# EAGLE board stm32-stamp (EAGLE 5.11)

Size 60.96 x 30.48 mm. Coordinates in mm from the lower left corner, seen from the top.
Outline: 0,0 60.96,0 60.96,30.48 0,30.48 0,0
Copper layers (1*16): Top 0.035mm / dielectric 1.5mm / Bottom 0.035mm
Design rules "default *": minimum track width 10mil, minimum drill 24mil, track to track 0.16mm, track to pad 0.16mm, pad to pad 0.16mm, via to via 0.16mm, smd to smd 0.16mm, copper to edge 0.4mm, drill to drill 8mil, minimum pad ring 10mil, minimum via ring 8mil, stop-mask expansion 4mil, vias tented up to drill 0.6mm, thermal gap 10mil
Net classes: 0 default: width 0.1 mm, drill 0.1 mm, clearance 0.1 mm

## Footprints (pad centres in the part's own frame; a part is rotated, then mirrored left to right if it is on the bottom)
C0603 = smd 0.8 x 0.8: 1 -0.762,0; 2 0.762,0
SMC_C = smd 2.4 x 2.4: + -2.5,0; - 2.5,0
1X20 = drill 1 square: 1 -24.13,0 | drill 1 round: 2 -21.59,0; 3 -19.05,0; 4 -16.51,0; 5 -13.97,0; 6 -11.43,0; 7 -8.89,0; 8 -6.35,0; 9 -3.81,0; 10 -1.27,0; 11 1.27,0; 12 3.81,0; 13 6.35,0; 14 8.89,0; 15 11.43,0; 16 13.97,0; 17 16.51,0; 18 19.05,0; 19 21.59,0; 20 24.13,0
CR2032H = drill 1.118 pad 2.54 octagon: + 5.08,10.795; +@1 -5.08,10.795; - 0,-6.985
SO08 = smd 0.66 x 2.032: 1 -1.905,-3.073; 2 -0.635,-3.073; 3 0.635,-3.073; 4 1.905,-3.073; 5 1.905,3.073; 6 0.635,3.073; 7 -0.635,3.073; 8 -1.905,3.073
SO-08M = smd 0.6 x 2.2: 1 -1.905,-3.33; 2 -0.635,-3.33; 3 0.635,-3.33; 4 1.905,-3.33; 5 1.905,3.33; 6 0.635,3.33; 7 -0.635,3.33; 8 -1.905,3.33
LQFP48 = smd 0.3 x 1.2: 1 -2.75,-4.25; 2 -2.25,-4.25; 3 -1.75,-4.25; 4 -1.25,-4.25; 5 -0.75,-4.25; 6 -0.25,-4.25; 7 0.25,-4.25; 8 0.75,-4.25; 9 1.25,-4.25; 10 1.75,-4.25; 11 2.25,-4.25; 12 2.75,-4.25; 25 2.75,4.25; 26 2.25,4.25; 27 1.75,4.25; 28 1.25,4.25; 29 0.75,4.25; 30 0.25,4.25; 31 -0.25,4.25; 32 -0.75,4.25; 33 -1.25,4.25; 34 -1.75,4.25; 35 -2.25,4.25; 36 -2.75,4.25 | smd 1.2 x 0.3: 13 4.25,-2.75; 14 4.25,-2.25; 15 4.25,-1.75; 16 4.25,-1.25; 17 4.25,-0.75; 18 4.25,-0.25; 19 4.25,0.25; 20 4.25,0.75; 21 4.25,1.25; 22 4.25,1.75; 23 4.25,2.25; 24 4.25,2.75; 37 -4.25,2.75; 38 -4.25,2.25; 39 -4.25,1.75; 40 -4.25,1.25; 41 -4.25,0.75; 42 -4.25,0.25; 43 -4.25,-0.25; 44 -4.25,-0.75; 45 -4.25,-1.25; 46 -4.25,-1.75; 47 -4.25,-2.25; 48 -4.25,-2.75
SO16 = smd 0.66 x 2.032: 1 -4.445,-3.073; 2 -3.175,-3.073; 3 -1.905,-3.073; 4 -0.635,-3.073; 5 0.635,-3.073; 6 1.905,-3.073; 7 3.175,-3.073; 8 4.445,-3.073; 9 4.445,3.073; 10 3.175,3.073; 11 1.905,3.073; 12 0.635,3.073; 13 -0.635,3.073; 14 -1.905,3.073; 15 -3.175,3.073; 16 -4.445,3.073
JTAG-ARM = drill 1.016 square: 1 -11.43,-1.27 | drill 1.016 octagon: 2 -11.43,1.27; 3 -8.89,-1.27; 4 -8.89,1.27; 5 -6.35,-1.27; 6 -6.35,1.27; 7 -3.81,-1.27; 8 -3.81,1.27; 9 -1.27,-1.27; 10 -1.27,1.27; 11 1.27,-1.27; 12 1.27,1.27; 13 3.81,-1.27; 14 3.81,1.27; 15 6.35,-1.27; 16 6.35,1.27; 17 8.89,-1.27; 18 8.89,1.27; 19 11.43,-1.27; 20 11.43,1.27
1X02M = drill 0.9 square: 1 -1,0 | drill 0.9 round: 2 1,0
L0603 = smd 0.8 x 0.8: 1 -0.762,0; 2 0.762,0
CHIP-LED0805 = smd 1.2 x 1.2: A 0,-1.05; C 0,1.05
HC49/S = drill 0.813 round: 1 -2.413,0; 2 2.413,0
TC26H = drill 0.813 round: 1 -1.27,0; 2 1.27,0
R0603 = smd 0.8 x 0.8: 1 -0.762,0; 2 0.762,0
KSS-2EG4430 = smd 1.6 x 1.4: 1 -3.75,0; 2 3.75,0
B1,27 = smd 1.27 x 1.27: PP 0,0
SOT223 = smd 1.219 x 2.235: 1 -2.311,-3.099; 2 0,-3.099; 3 2.311,-3.099 | smd 3.6 x 2.2: 4 0,3.099

## Placement (x,y rotation side)
C1  0.1  [C0603]  -15.24,63.5 0 top  (outside the outline)
C2  22uF/16V  [SMC_C]  -17.78,44.45 0 top  (outside the outline)
C6  0.1  [C0603]  -19.05,63.5 0 top  (outside the outline)
C8  0.1  [C0603]  -22.86,63.5 0 top  (outside the outline)
C12  0.1  [C0603]  -26.67,63.5 0 top  (outside the outline)
C13  0.1  [C0603]  -30.48,63.5 0 top  (outside the outline)
C14  0.1  [C0603]  -34.29,63.5 0 top  (outside the outline)
C15  22pF  [C0603]  -38.1,63.5 0 top  (outside the outline)
C16  22pF  [C0603]  -41.91,63.5 0 top  (outside the outline)
C17  10pF  [C0603]  -45.72,63.5 0 top  (outside the outline)
C18  10pF  [C0603]  -49.53,63.5 0 top  (outside the outline)
C19  0.1  [C0603]  -53.34,63.5 0 top  (outside the outline)
C20  0.1  [C0603]  -57.15,63.5 0 top  (outside the outline)
C21  0.1  [C0603]  -60.96,63.5 0 top  (outside the outline)
C22  0.1  [C0603]  -64.77,63.5 0 top  (outside the outline)
C31  0.1  [C0603]  -68.58,63.5 0 top  (outside the outline)
C32  100uF/6.3V  [SMC_C]  -58.42,36.83 0 top  (outside the outline)
C42  1uF  [C0603]  -15.24,68.58 0 top  (outside the outline)
C43  1uF  [C0603]  -19.05,68.58 0 top  (outside the outline)
C44  1uF  [C0603]  -22.86,68.58 0 top  (outside the outline)
C45  1uF  [C0603]  -26.67,68.58 0 top  (outside the outline)
C46  0.1  [C0603]  -30.48,68.58 0 top  (outside the outline)
CON1  [1X20]  26.67,2.54 0 top
CON2  [1X20]  26.67,27.94 180 top
G1  CR2032H  [CR2032H]  -22.86,10.16 0 top  (outside the outline)
IC2  AT24C256S  [SO08]  -38.1,5.08 0 top  (outside the outline)
IC3  AT26DF-SU  [SO-08M]  -66.04,5.08 0 top  (outside the outline)
IC4  STM32F103C8  [LQFP48]  26.67,15.24 0 top
IC9  MAX3232  [SO16]  -19.05,36.83 0 top  (outside the outline)
J1  JTAG-ARM-HDR100  [JTAG-ARM]  57.15,15.24 270 top
JP1  [1X02M]  -62.23,72.39 0 top  (outside the outline)
L1  bead  [L0603]  -34.29,68.58 0 top  (outside the outline)
LED1  [CHIP-LED0805]  -67.31,57.15 0 top  (outside the outline)
Q3  8MHz  [HC49/S]  -45.72,27.94 0 top  (outside the outline)
Q4  32768Hz  [TC26H]  -58.42,1.27 0 top  (outside the outline)
R2  10K  [R0603]  -38.1,68.58 0 top  (outside the outline)
R3  10K  [R0603]  -41.91,68.58 0 top  (outside the outline)
R4  10K  [R0603]  -45.72,68.58 0 top  (outside the outline)
R5  10K  [R0603]  -49.53,68.58 0 top  (outside the outline)
R6  10K  [R0603]  -53.34,68.58 0 top  (outside the outline)
R7  10K  [R0603]  -57.15,68.58 0 top  (outside the outline)
R8  10K  [R0603]  -60.96,68.58 0 top  (outside the outline)
R9  4.7K  [R0603]  -64.77,68.58 0 top  (outside the outline)
R10  220  [R0603]  -68.58,68.58 0 top  (outside the outline)
R11  10K  [R0603]  -15.24,73.66 0 top  (outside the outline)
R12  330  [R0603]  -19.05,73.66 0 top  (outside the outline)
R13  1M  [R0603]  -22.86,73.66 0 top  (outside the outline)
R14  10K  [R0603]  -26.67,73.66 0 top  (outside the outline)
R18  2.2K  [R0603]  -30.48,73.66 0 top  (outside the outline)
R19  10K  [R0603]  -34.29,73.66 0 top  (outside the outline)
R24  4.7K  [R0603]  -38.1,73.66 0 top  (outside the outline)
R25  4.7K  [R0603]  -41.91,73.66 0 top  (outside the outline)
SW1  KSS-2EG4430  [KSS-2EG4430]  -34.29,36.83 0 top  (outside the outline)
SW2  KSS-2EG4430  [KSS-2EG4430]  -46.99,36.83 0 top  (outside the outline)
TP1  TPB1,27  [B1,27]  -46.99,72.39 0 top  (outside the outline)
TP2  TPB1,27  [B1,27]  -50.8,72.39 0 top  (outside the outline)
TP3  TPB1,27  [B1,27]  -54.61,72.39 0 top  (outside the outline)
TP4  TPB1,27  [B1,27]  -58.42,72.39 0 top  (outside the outline)
U1  LM1117-3.3  [SOT223]  -59.69,27.94 0 top  (outside the outline)

## Library data of the parts
C1 C2 C6 C8 C12-C22 C31 C32 C42-C46 L1 R2-R14 R18 R19 R24 R25 = rc-master-smd
CON1 CON2 = stamp
G1 = battery
IC2 = stm32-by-pb
IC3 = memory-spi
IC4 = stm32
IC9 = rs232-rs485
J1 = atmel-arm
JP1 = pinhead-fixdrills
LED1 = led
Q3 Q4 = discrete
SW1 SW2 = buttons
TP1-TP4 = testpad
U1 = vreg-linear

## Nets
!JTRST: IC4.40 J1.3 R6.1
!RST: C8.1 IC4.7 J1.15 R7.1 SW2.2
!SPI2_CS: IC3.1 R9.1
+3V3: C6.2 C12.1 C13.1 C19.1 C20.1 C21.1 C31.1 C32.+ C46.1 IC2.8 IC3.3 IC3.7 IC3.8 IC4.24 IC4.36 IC4.48 IC9.16 J1.1 J1.2 JP1.1 L1.1 R2.2 R3.2 R4.2 R5.2 R6.2 R7.2 R9.2 R11.2 R24.2 R25.2 U1.2
+5V: C1.1 C2.+ U1.3
BOOT0: IC4.44 R18.1
BOOT1: IC4.20 R10.1 R14.1
CTS1: IC9.12
GND: C1.2 C2.- C6.1 C8.2 C12.2 C13.2 C14.2 C15.2 C16.2 C17.2 C18.2 C19.2 C20.2 C21.2 C22.2 C31.2 C32.- C42.2 C44.2 C46.2 G1.- IC2.1 IC2.2 IC2.3 IC2.4 IC2.7 IC3.4 IC4.8 IC4.23 IC4.35 IC4.47 IC9.15 J1.4 J1.6 J1.8 J1.10 J1.12 J1.14 J1.16 J1.18 J1.20 LED1.C R8.1 R14.2 R19.1 SW1.1 SW2.1 TP4.PP U1.1
HEAT: U1.4
JTCK: IC4.37 J1.9 R3.1
JTDI: IC4.38 J1.5 R5.1
JTDO: IC4.39 J1.13 R2.1
JTMS: IC4.34 J1.7 R4.1
N$1: C14.1 R11.1 R12.1 SW1.2
N$3: JP1.2 R18.2 R19.2
N$6: J1.11 R8.2
N$15: C45.2 IC9.4
N$16: C45.1 IC9.5
N$17: C43.1 IC9.3
N$19: C43.2 IC9.1
N$24: C42.1 IC9.2
N$25: C44.1 IC9.6
N$30: LED1.A R10.2
OSC32_IN: C17.1 IC4.3 Q4.2
OSC32_OUT: C18.1 IC4.4 Q4.1 TP1.PP
OSC_IN1: C15.1 IC4.5 Q3.1 R13.1
OSC_OUT1: C16.1 IC4.6 Q3.2 R13.2 TP2.PP
PA0: IC4.10 R12.2
PA1: IC4.11
PA4: IC4.14
PA5: IC4.15
PA6: IC4.16
PA7: IC4.17
RS232-CTS: IC9.13
RS232-RTS: IC9.14
RS232-RXD: IC9.8
RS232-TXD: IC9.7
RTS1: IC9.11
RXD1: IC4.31 IC9.9
SCL1: IC2.6 IC4.42 R24.1
SDA1: IC2.5 IC4.43 R25.1
SPI2_MISO: IC3.2
SPI2_MOSI: IC3.5
SPI2_SCK: IC3.6
TXD1: IC4.30 IC9.10
VBAT: G1.+ IC4.1 TP3.PP
VDDA: C22.1 IC4.9 L1.2

## Tracks (layer width: path | path; a pad name or v marks a point on that pad's centre or on a via)
!JTRST  (2 unrouted)
!RST  (4 unrouted)
!SPI2_CS  (1 unrouted)
+3V3  (31 unrouted)
+5V  (2 unrouted)
BOOT0  (1 unrouted)
BOOT1  (2 unrouted)
GND  (48 unrouted)
JTCK  (2 unrouted)
JTDI  (2 unrouted)
JTDO  (2 unrouted)
JTMS  (2 unrouted)
N$1  (3 unrouted)
N$3  (2 unrouted)
N$6  (1 unrouted)
N$15  (1 unrouted)
N$16  (1 unrouted)
N$17  (1 unrouted)
N$19  (1 unrouted)
N$24  (1 unrouted)
N$25  (1 unrouted)
N$30  (1 unrouted)
OSC32_IN  (2 unrouted)
OSC32_OUT  (3 unrouted)
OSC_IN1  (3 unrouted)
OSC_OUT1  (4 unrouted)
PA0  (1 unrouted)
RXD1  (1 unrouted)
SCL1  (2 unrouted)
SDA1  (2 unrouted)
TXD1  (1 unrouted)
VBAT  (2 unrouted)
VDDA  (2 unrouted)